# Altium PCB l298.PcbDoc
Units mil, origin at the board's own origin, x right, y up, seen from the top; angles counter-clockwise.
Board outline 2230.03 x 1350.03 mil, 2 copper layers (Top Layer, Bottom Layer); 17 components, 15 nets, 59 pads, 21 vias.
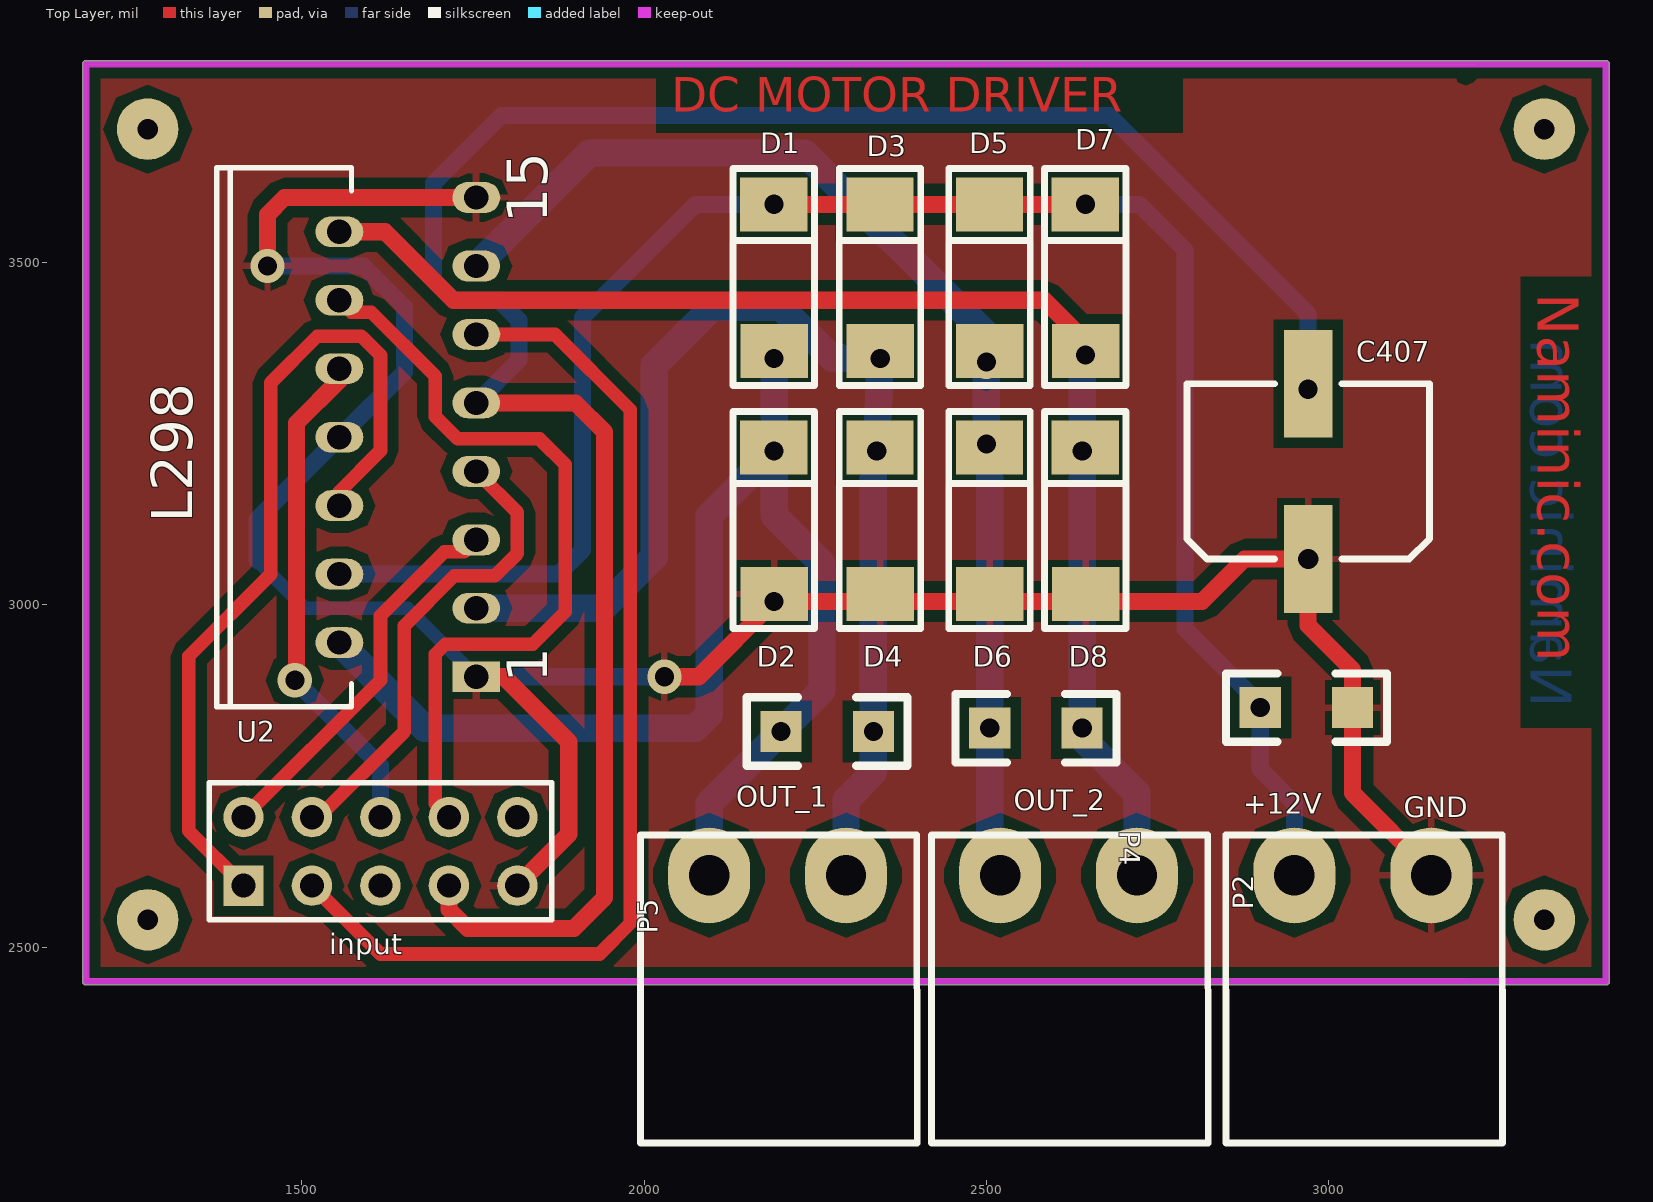
[diagram p0: Top Layer view]
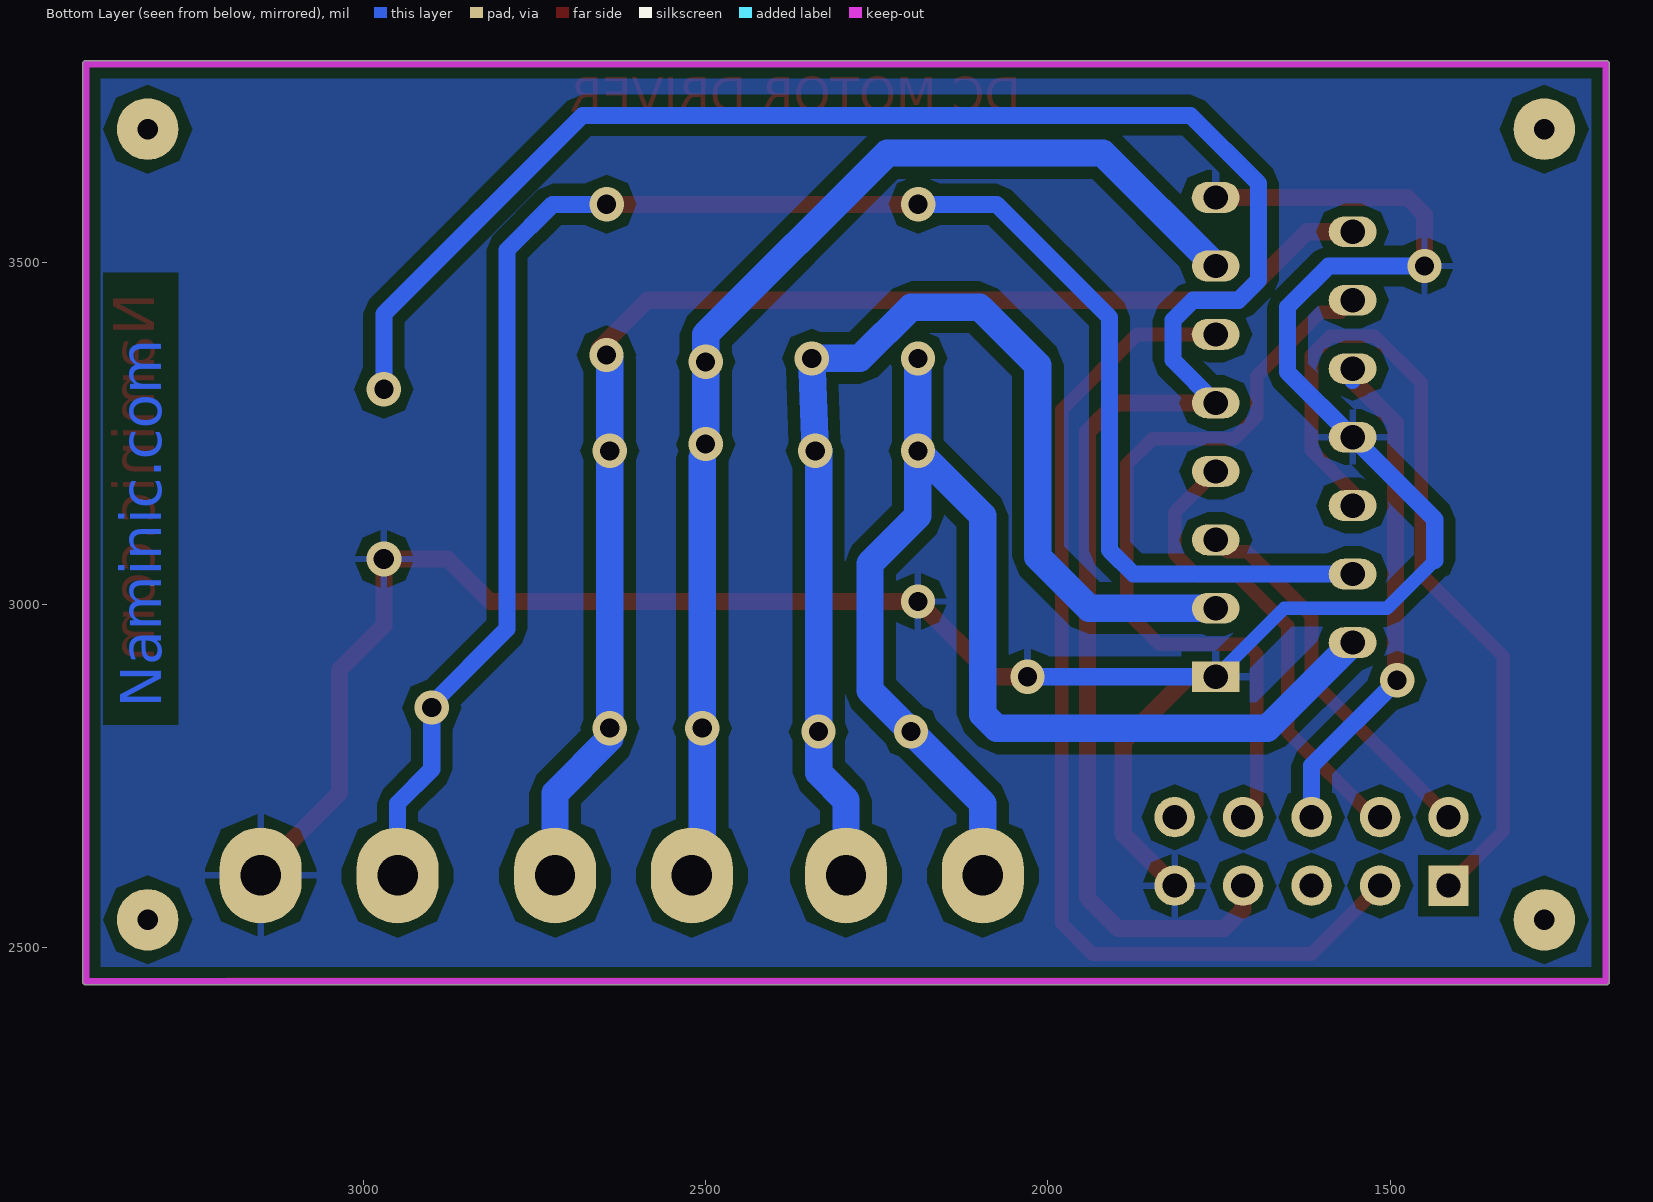
[diagram p1: Bottom Layer view, seen from below]

## Layer stack, top to bottom
Top Layer: signal copper 1.4
Dielectric: dielectric 12.6, FR-4, Dk 4.8
Bottom Layer: signal copper 1.4

## Board outline
1185,2444.99 cw(c1185,2450) 1179.98,2450 1179.98,3790 cw(c1185,3790) 1185,3795.01 3405,3795.01 cw(c3405,3790) 3410.01,3790 3410.01,2450 cw(c3405,2450) 3405,2444.99

## Design rules (kind name [scope] priority, off if disabled: settings)
Clearance [All] p1: gap=15
PolygonConnect [All] p1: connectstyle=Relief reliefconductorwidth=10 reliefentries=4 polygonreliefangle="90 Angle"
RoutingVias [All] p1: holewidth=28 width=50 viastyle="Through Hole" minholewidth=28 minwidth=50 maxholewidth=28 maxwidth=50
SilkscreenOverComponentPads SilkToSolderMaskClearance [IsPad] p1: minsilkscreentomaskgap=10
SolderMaskExpansion [All] p1: expansion=4
Width [All] p1: maxlimit=50 minlimit=15 preferedwidth=25
27 further rules are at their usual default settings.

## Components (designator, comment, footprint, x,y, rotation, side; value= is the part's Value field where it differs from the comment)
+12V "Cap" 1206 3035,2850 r180 top (schematic designator C1206)
C407 "Cap" CAP470 2970,3195 r270 top
D1 "Diode 1N4001" 1N4007 2190,3360 r90 top
D2 "Diode 1N4001" 1N4007 2190,3005 r90 top
D3 "Diode 1N4001" 1N4007 2345,3360 r90 top
D4 "Diode 1N4001" 1N4007 2345,3005 r90 top
D5 "Diode 1N4001" 1N4007 2505,3360 r90 top
D6 "Diode 1N4001" 1N4007 2505,3005 r90 top
D7 "Diode 1N4001" 1N4007 2645,3360 r90 top
D8 "Diode 1N4001" 1N4007 2645,3005 r90 top
input "Header 5X2" HDR2X5 1415,2590 r0 top
OUT_1 "Cap" 1206 2335,2815 r180 top (schematic designator C_OUT1)
OUT_2 "Cap" 1206 2640,2820 r180 top (schematic designator C_OUT2)
P2 "Header 2" POWER2_NEW 2950,2605 r0 top
P4 "M2" POWER2_NEW 2520,2605 r0 top
P5 "M1" POWER2_NEW 2095,2605 r0 top
U2 "L298N" Multiwatt15V 1655,3245 r90 top

## Footprints (in the part's own frame and the unit in brackets; to place one, negate y for a bottom-side part, rotate by r counter-clockwise, add the part's x,y. Pads: shape width x height; smd on the part's side, far side on the other; paste and mask are expansions set on the pad)
1N4007 [mm]
  rect 2x2.5 smd: 1(0.277,-0.005) 2(5.718,0.01)
  silkscreen extent -1.01,-1.5 7.05,1.52
1206 [mil]
  rect 60x60 smd: 1(0,0) 2(135,0)
  silkscreen extent -50,-50 185,50, body extent -14,-35 151,36, height 25
CAP470 [mm]
  rect 4x1.8 smd: 1(3.25,0) 2(-3.25,0)
  silkscreen extent -3.25,-4.5 3.25,4.5, body extent -5.47,-5.08 5.53,5.22, height 7.9
HDR2X5 [mm] "Connector; Header; 5x2 Position"
  rect 1.5x1.5 hole 0.9: 1(0,0)
  round 1.5 hole 0.9: 2(0,2.54) 3(2.54,0) 4(2.54,2.54) 5(5.08,0) 6(5.08,2.54) 7(7.62,0) 8(7.62,2.54) 9(10.16,0) 10(10.16,2.54)
  silkscreen extent -1.27,-1.27 11.43,3.81
Multiwatt15V [mil] "TO, Thru-Hole, Vertical, Heatsink Mounted; 15 Bent Staggered Leads; Pitch 1.27 mm"
  rect 45x70 hole 35.43: 1(-350,-100)
  oval 45x70 hole 35.43: 2(-300,100) 3(-250,-100) 4(-200,100) 5(-150,-100) 6(-100,100) 7(-50,-100) 8(0,100) 9(50,-100) 10(100,100) 12(200,100) 13(250,-100) 14(300,100)
  oval 45x70.06 hole 35.43: 11(150,-100)
  oval 45.05x70.06 hole 35.43: 15(350,-100)
  silkscreen extent -394,82 394,279
POWER2_NEW [mil]
  oval 120x140 hole 59.06: 1(200,0) 2(0,0)
  silkscreen extent -100,-391 304,59

## Part data
+12V C407 OUT_1 OUT_2: "Capacitor"
D1 D2 D3 D4 D5 D6 D7 D8: "1 Amp General Purpose Rectifier"
input: "Header, 5-Pin, Dual row"
P2: "Header, 2-Pin"
P4 P5: library part "Header 2", "Header, 2-Pin"
U2: "Dual Full Bridge Driver"

## Free pads (board coordinates)
  round 90 hole 30: 0(1275,3695) 1(3315,3695) 2(3315,2540) 3(1275,2540)

## Via types
v1: diameter 50, hole 28, Top Layer to Bottom Layer, 20 vias
v2: diameter 51.18, hole 29.53, Top Layer to Bottom Layer, 1 vias

## Nets (pads, with @x,y where several pads share a name; then routed paths per layer and width w, separated by ;. In a path a pad name is that pad's centre, name@x,y a point inside that pad or via, vN(x,y) a via of type N, cw(c..) or ccw(c..) an arc to the next point about the centre after c; other vN are vias at no path point)
+3.3V: input.10
+5V: C407.2 input.7 U2.9 | length 3163.8
  Top Layer w25: input.7 1715,2555 1742.5,2527.5 1897.5,2527.5 1942.5,2572.5 1942.5,3252.5 1900,3295 U2.9
  Bottom Layer w25: U2.9 1817.53,3357.53 1817.53,3415.71 1788.24,3445 1721.79,3445 1692.47,3474.32 1692.47,3615.72 1791.75,3715 2680,3715 2970,3425 v1(2970,3315)
+12V: +12V.2 D1.2 D3.2 D5.2 D7.2 P2.2 U2.4 | length 2663.7
  Top Layer w25: v1(2189.6,3585.1) D3.2 v1(2644.6,3585.1)
  Bottom Layer w25: U2.4 1875,3045 1910,3080 1910,3420 2075.1,3585.1 v1(2189.6,3585.1) ; v1(2644.6,3585.1) 2723.33,3585.1 2790,3518.43 2790,2965 v1@2902.5,2852.5 ; v1(2900,2850) 2900,2760 2950,2710 P2.2
GND: +12V.1 C407.1 D2.1 D4.1 D6.1 D8.1 input.9 P2.1 U2.1 U2.8 U2.15 | length 3717.1
  Top Layer w25: v1(1450,3495) 1450,3570 1475,3595 U2.15 ; U2.1 1795,2895 1890,2800 1890,2665 input.9 ; v1(2030,2895) 2080,2895 v1(2190,3005) 2815,3005 2877.05,3067.05 v2(2970,3067.05) 2970,2970 3035,2905 +12V.1 3035,2725 3150,2610 P2.1
  Bottom Layer w20: 1435,3065 1505,2995 1655,2995 U2.1
  Bottom Layer w25: 1435,3065 1435,3125 U2.8 1650,3340 1650,3435 1590,3495 v1(1450,3495) ; U2.1 v1(2030,2895) ; U2.15 U2.15@1765,3585
INPUT1: input.2 U2.5 | length 562.9
  Top Layer w20: input.2 1615,2890 1615,2984.17 1708.33,3077.5 1737.5,3077.5 U2.5
INPUT2: input.4 U2.7 | length 694.7
  Top Layer w20: input.4 1525,2690 1650,2815 1650,2969.68 1722.82,3042.5 1782.18,3042.5 1815,3075.32 1815,3135 U2.7
INPUT3: input.6 U2.10 | length 744.5
  Top Layer w25: v1@1492.5,2895 1492.5,3265.71 1555,3328.21 U2.10
  Bottom Layer w25: v1(1490,2890) 1615,2765 input.6 ; U2.10@1555,3328.21 U2.10
INPUT4: input.8 U2.12 | length 1140.8
  Top Layer w20: U2.12 1572.5,3427.5 1601.67,3427.5 1695,3334.17 1695,3275.32 1727.82,3242.5 1847.5,3242.5 1885,3205 1885,2990 1837.5,2942.5 1709.64,2942.5 1695,2927.86 1695,2710 input.8
NetC_OUT1_1: D3.1 D4.2 OUT_1.1 P5.1 U2.3 | length 1739
  Bottom Layer w40: U2.3 1940,2995 2015,3070 2015,3350 2100,3435 2199.85,3435 2274.85,3360 v1(2345,3360) v1(2340,3225) ; P5.1 2295,2715 2335,2755 v1(2335,2815) v1@2335,3225
NetC_OUT1_2: D1.1 D2.2 OUT_1.2 P5.2 U2.2 | length 1876.8
  Bottom Layer w40: U2.2 1680,2820 2075,2820 2095,2840 2095,3130 v1(2190,3225) ; P5.2 2095,2710 v1(2200,2815) 2260,2875 2260,3060 2190,3130 v1(2190,3225) ; v1(2190,3360) v1(2190,3225)
NetC_OUT2_1: D7.1 D8.2 OUT_2.1 P4.1 U2.14 | length 1965.6
  Top Layer w25: U2.14 1621.79,3545 1692.5,3474.29 1721.79,3445 2585,3445 D7.1@2655,3375
  Bottom Layer w40: v1(2645,3365) 2640,3360 v1(2640,3225) v1(2640,2820) 2640,2805 2720,2725 P4.1
NetC_OUT2_2: D5.1 D6.2 OUT_2.2 P4.2 U2.13 | length 1699.3
  Bottom Layer w40: U2.13 1920,3660 2235,3660 2500,3395 v1(2500,3355) v1(2500,3235) ; v1@2505,3215 v1(2505,2820) 2505,2620 P4.2
PWM1: input.1 U2.6 | length 1261.7
  Top Layer w20: input.1 1335,2670 1335,2925 1455,3045 1455,3324.68 1522.82,3392.5 1587.18,3392.5 1615,3364.68 1615,3225.32 1555,3165.32 U2.6
PWM2: input.3 U2.11 | length 1545.6
  Top Layer w20: input.3 1615,2490 1935,2490 1980,2535 1980,3285 1870,3395 U2.11
PWM3: input.5
copper on no net: | length 5380
  Top Layer w1: 3200,2455 1185,2455 1185,3790 3215,3790

## Polygon pours and split planes (outlines as drawn)
GND on Top Layer "Top Layer-No Net" (solid, pour order 0): 1185,3790 3405,3790 3405,2450 1185,2450 1185,3790
GND on Bottom Layer "Top Layer-No Net" (solid, pour order 2): 1185,3790 3395,3790 3395,2450 1185,2450 1185,3790

## Keep-outs
Keep-Out Layer:
  lines w10: 1185,2450 1185,3790 3405,3790 3405,2450 1185,2450

## Other copper
Top Layer:
  text "DC MOTOR DRIVER" at 2040,3720 h50
  text "Naminic.com" at 3305,3455 h60 r270
Bottom Layer:
  text "Naminic.com" at 3295,2850 h60 r270

## Silkscreen, mask and mechanical layers (free items; w line width, h text height)
Top Overlay:
  text "L298" at 1340,3120 h60 r90
  text "GND" at 3110,2690 h30

## Text inside footprints (layer, text, board x,y; h text height)
U2: Top Overlay "1" at 1858.35,2885.94 h59.06 r90; Top Overlay "15" at 1858.35,3557.6 h59.06 r90